# Altium PCB connect.PcbDoc
Units mil, origin at the board's own origin, x right, y up, seen from the top; angles counter-clockwise.
Board outline 2070 x 1710 mil, 2 copper layers (Top Layer, Bottom Layer); 9 components, 19 nets, 101 pads, 1 vias.
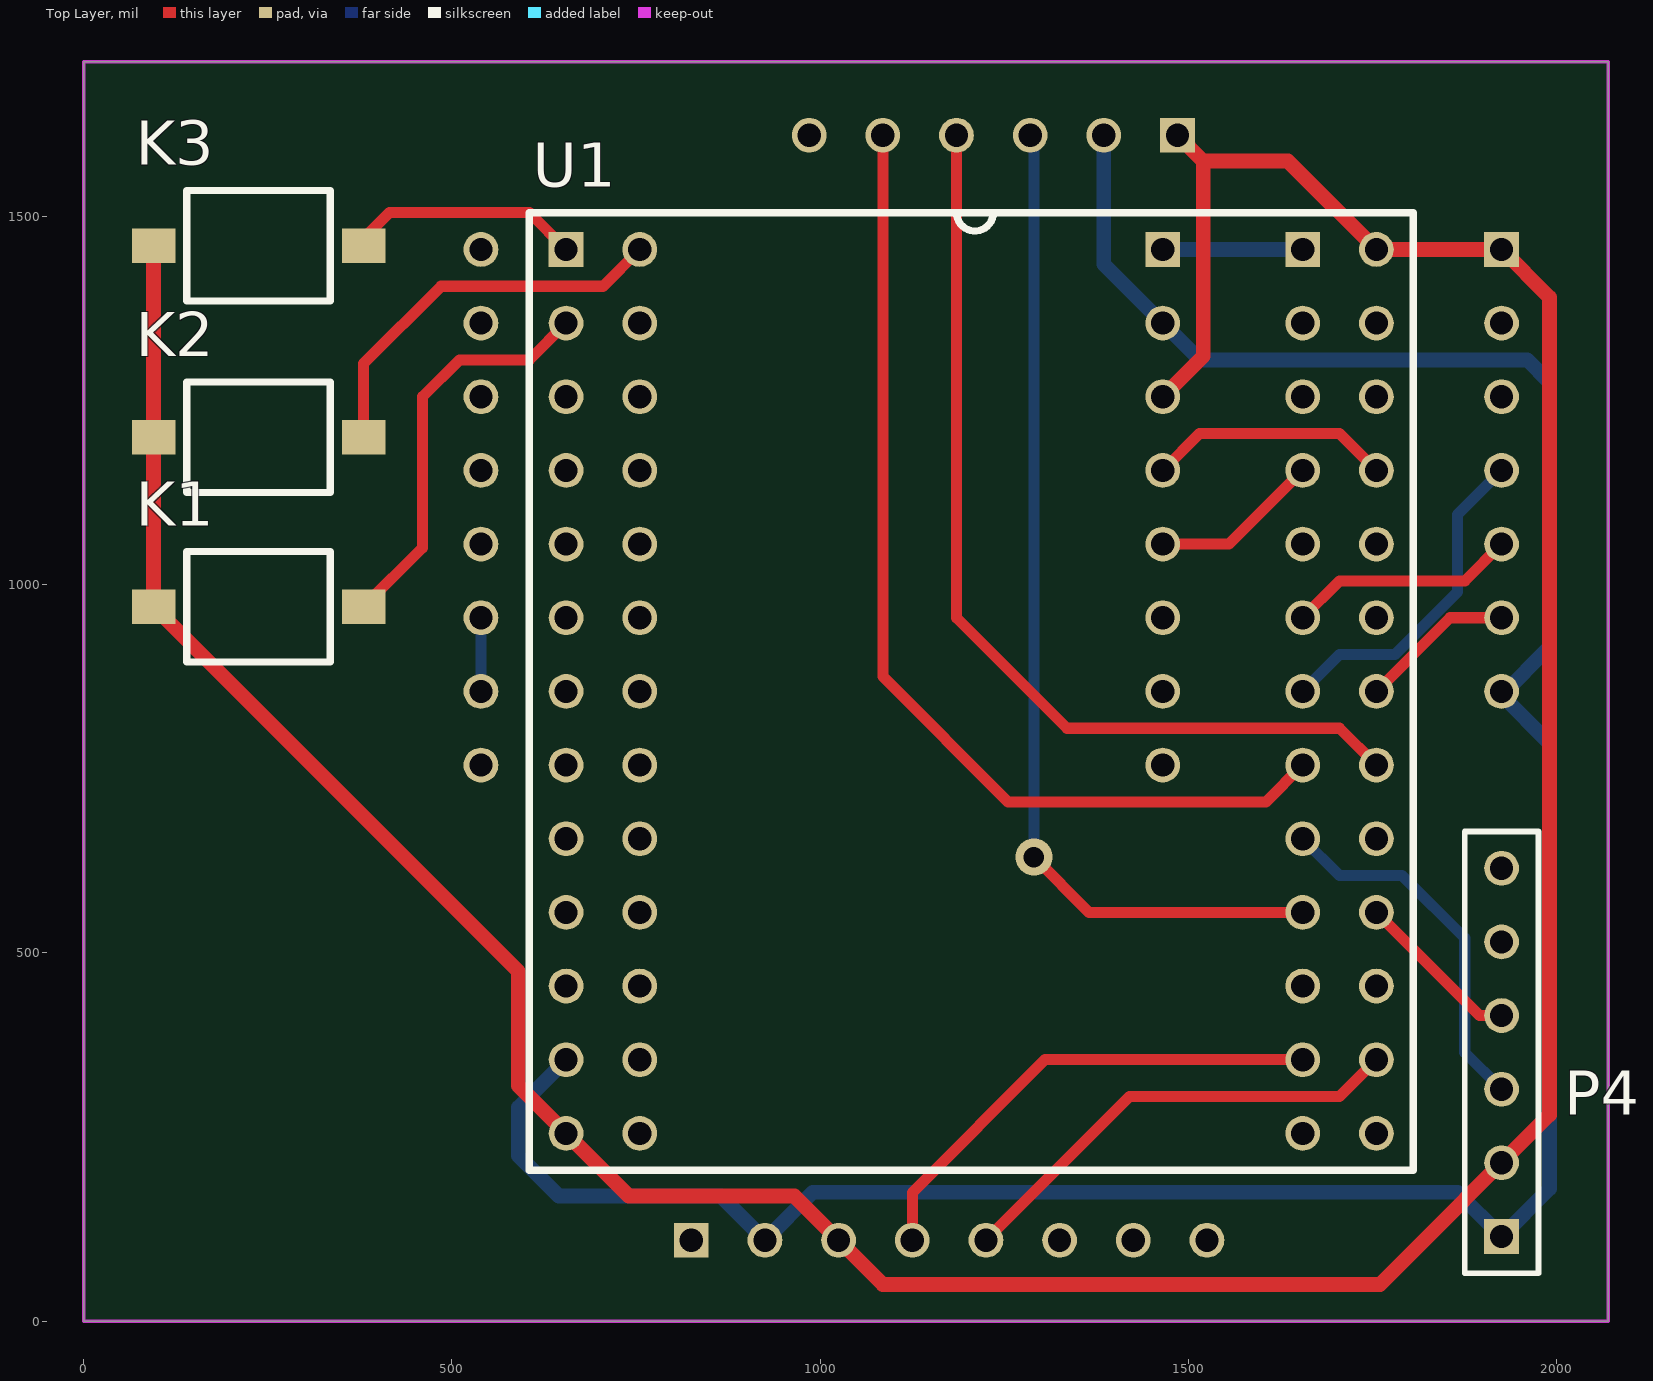
[diagram p0: Top Layer view]
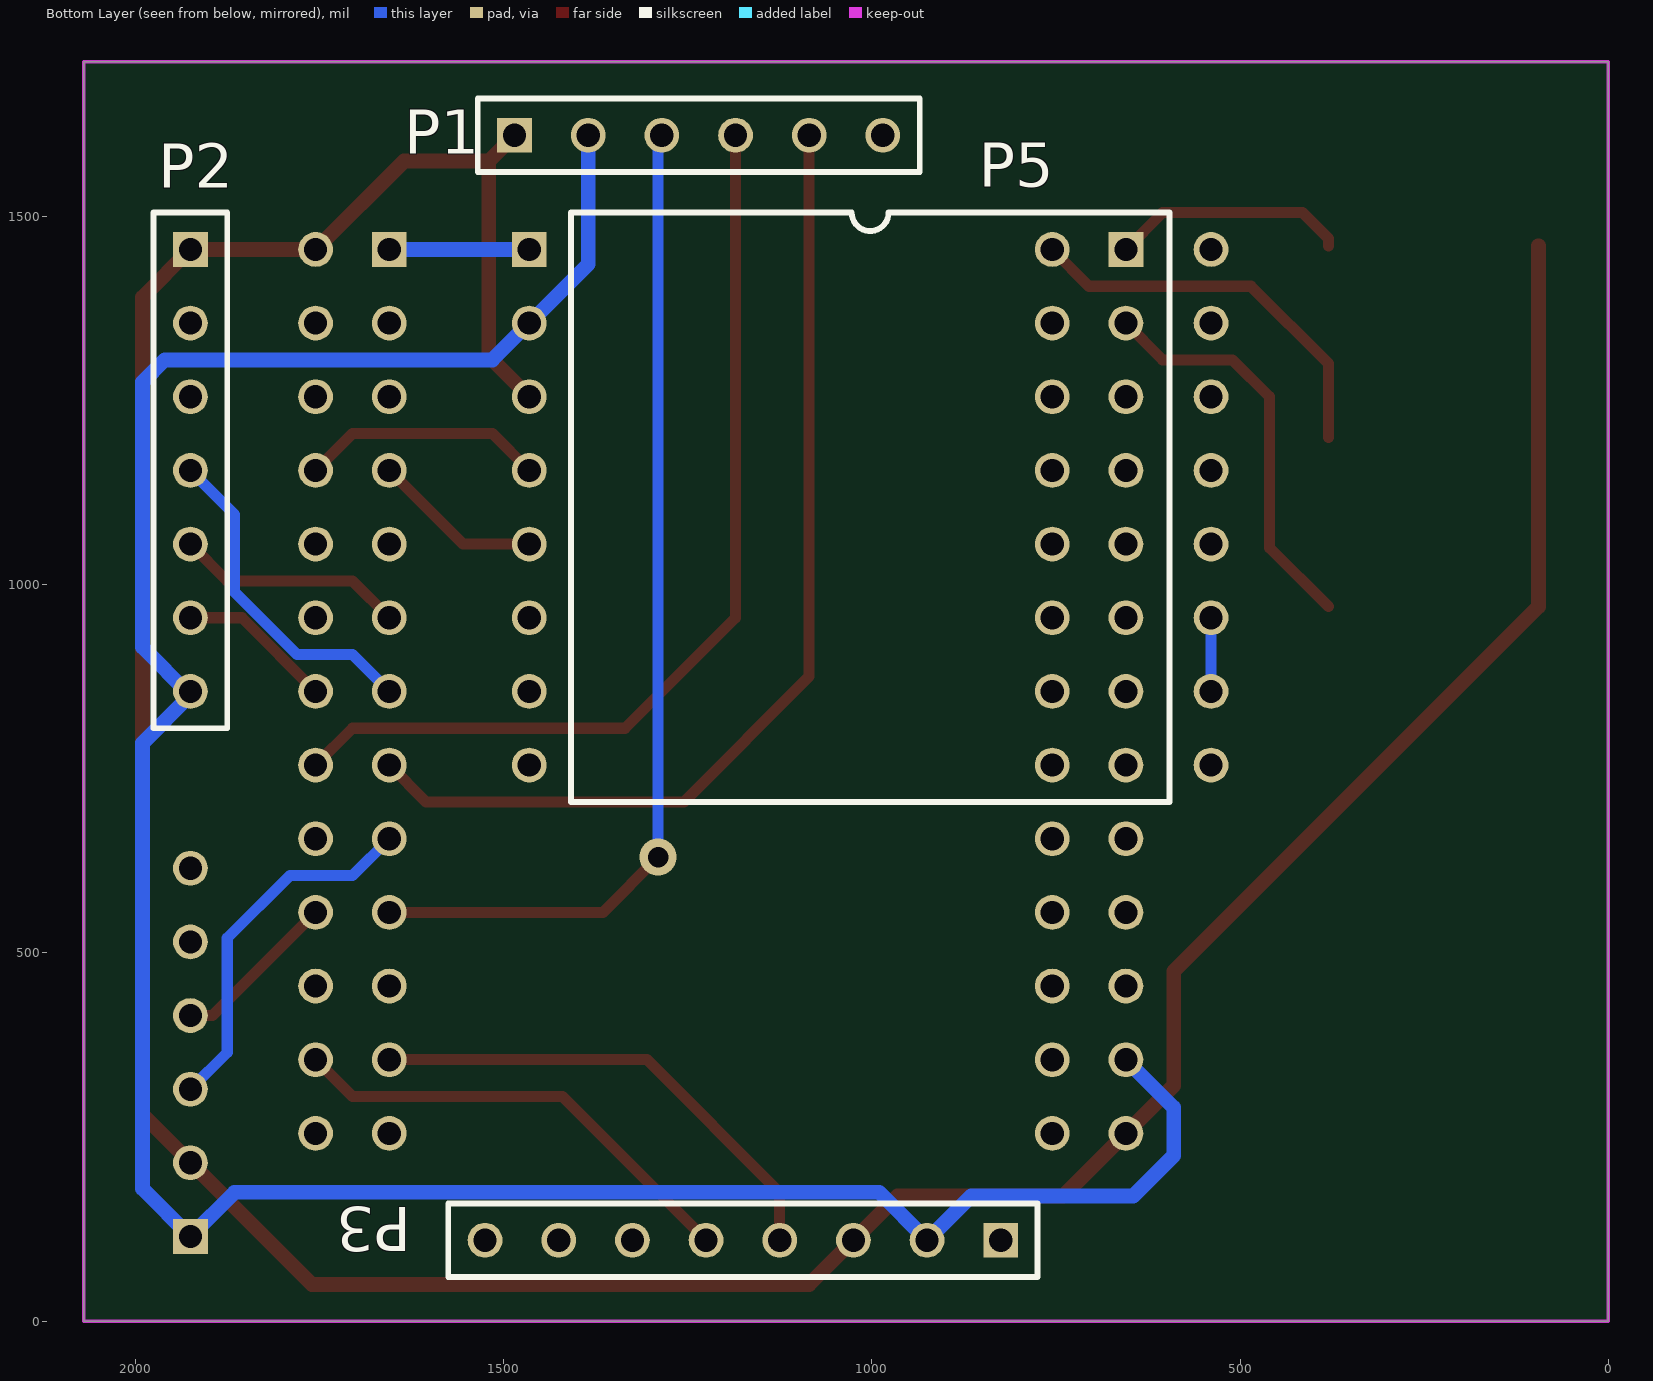
[diagram p1: Bottom Layer view, seen from below]

## Layer stack, top to bottom
Top Layer: signal copper 1.4
Dielectric: dielectric 12.6, FR-4, Dk 4.8
Bottom Layer: signal copper 1.4

## Board outline
0,0 0,1710 2070,1710 2070,0

## Design rules (kind name [scope] priority, off if disabled: settings)
Clearance [All] p1: gap=15
ComponentClearance [All] p1: gap=10 collisioncheckmode=3 verticalgap=10
PolygonConnect [All] p1: connectstyle=Relief reliefconductorwidth=10 reliefentries=4 polygonreliefangle="90 Angle"
RoutingVias [All] p1: holewidth=28 width=50 viastyle="Through Hole" minholewidth=28 minwidth=50 maxholewidth=28 maxwidth=50
SolderMaskExpansion [All] p1: expansion=4
TestPointUsage [All] p1: valid=0 allowmultiple=FALSE
Testpoint [All] p1: side=15 testpointundercomponent=TRUE minsize=40 maxsize=100 preferedsize=60 minholesize=0 maxholesize=40 preferedholesize=32 testpointgrid=1 style=1023 order=0123456789
Width Width_5.0 [InNet('5.0V')] p1: maxlimit=20 minlimit=10 preferedwidth=20
Width Width_3.3 [All] p2: maxlimit=20 minlimit=10 preferedwidth=20
Width Width_1 [All] p3: maxlimit=15 minlimit=10 preferedwidth=15
Width Width_GND [InNet('GND')] p4: maxlimit=20 minlimit=10 preferedwidth=20
18 further rules are at their usual default settings.

## Components (designator, comment, footprint, x,y, rotation, side; value= is the part's Value field where it differs from the comment)
K1 "KEY" KEY 95,970 r0 top
K2 "KEY" KEY 95,1200 r0 top
K3 "KEY" KEY 95,1460 r0 top
P1 "AD8232" AD8232 1485,1610 r180 bottom
P2 "MAX30102" MAX30102 1925,1455 r270 bottom
P3 "MPU" MPU 825,110 r0 bottom
P4 "WIFI" WIFI 1925,115 r90 top
P5 "GPRS" GPRS 1465,1455 r180 bottom
U1 "CORE_BOARD" CORE_BOARD 655,1455 r0 top

## Footprints (in the part's own frame and the unit in brackets; to place one, negate y for a bottom-side part, rotate by r counter-clockwise, add the part's x,y. Pads: shape width x height; smd on the part's side, far side on the other; paste and mask are expansions set on the pad)
AD8232 [mm] "Connector; Header; 6 Position"
  rect 1.2x1.2 hole 0.8: 1(0,0)
  round 1.2 hole 0.8: 2(2.54,0) 3(5.08,0) 4(7.62,0) 5(10.16,0) 6(12.7,0)
  silkscreen extent -1.27,-1.27 13.97,1.27
CORE_BOARD [mm]
  rect 1.2x1.2 hole 0.8: 1(0,0) 27(25.4,0)
  round 1.2 hole 0.8: 2(0,-2.54) 3(0,-5.08) 4(0,-7.62) 5(0,-10.16) 6(0,-12.7) 7(0,-15.24) 8(0,-17.78) 9(0,-20.32) 10(0,-22.86) 11(0,-25.4) 12(0,-27.94) 13(0,-30.48) 14(2.54,-30.48) 15(2.54,-27.94) 16(2.54,-25.4) 17(2.54,-22.86) 18(2.54,-20.32) 19(2.54,-17.78) 20(2.54,-15.24) 21(2.54,-12.7) 22(2.54,-10.16) 23(2.54,-7.62) 24(2.54,-5.08) 25(2.54,-2.54) 26(2.54,0) 28(25.4,-2.54) 29(25.4,-5.08) 30(25.4,-7.62) 31(25.4,-10.16) 32(25.4,-12.7) 33(25.4,-15.24) 34(25.4,-17.78) 35(25.4,-20.32) 36(25.4,-22.86) 37(25.4,-25.4) 38(25.4,-27.94) 39(25.4,-30.48) 40(27.94,-30.48) 41(27.94,-27.94) 42(27.94,-25.4) 43(27.94,-22.86) 44(27.94,-20.32) 45(27.94,-17.78) 46(27.94,-15.24) 47(27.94,-12.7) 48(27.94,-10.16) 49(27.94,-7.62) 50(27.94,-5.08) 51(27.94,-2.54) 52(27.94,0)
  silkscreen extent -1.27,-31.75 29.21,1.27
GPRS [mm]
  rect 1.2x1.2 hole 0.8: 1(0,0)
  round 1.2 hole 0.8: 2(0,-2.54) 3(0,-5.08) 4(0,-7.62) 5(0,-10.16) 6(0,-12.7) 7(0,-15.24) 8(0,-17.78) 9(23.51,-17.78) 10(23.51,-15.24) 11(23.51,-12.7) 12(23.51,-10.16) 13(23.51,-7.62) 14(23.51,-5.08) 15(23.51,-2.54) 16(23.51,0)
  silkscreen extent 1.43,-19.05 22.08,1.27
KEY [mm]
  rect 1.5x1.2 smd: 1(0,0) 2(7.239,0)
  silkscreen extent 1.14,-1.91 6.1,1.91
MAX30102 [mm] "Connector; Header; 7 Position"
  rect 1.2x1.2 hole 0.8: 1(0,0)
  round 1.2 hole 0.8: 2(2.54,0) 3(5.08,0) 4(7.62,0) 5(10.16,0) 6(12.7,0) 7(15.24,0)
  silkscreen extent -1.27,-1.27 16.51,1.27
MPU [mm] "Connector; Header; 8 Position"
  rect 1.2x1.2 hole 0.8: 1(0,0)
  round 1.2 hole 0.8: 2(2.54,0) 3(5.08,0) 4(7.62,0) 5(10.16,0) 6(12.7,0) 7(15.24,0) 8(17.78,0)
  silkscreen extent -1.27,-1.27 19.05,1.27
WIFI [mm] "Connector; Header; 6 Position"
  rect 1.2x1.2 hole 0.8: 1(0,0)
  round 1.2 hole 0.8: 2(2.54,0) 3(5.08,0) 4(7.62,0) 5(10.16,0) 6(12.7,0)
  silkscreen extent -1.27,-1.27 13.97,1.27

## Via types
v1: diameter 50, hole 28, Top Layer to Bottom Layer, 1 vias

## Nets (pads, with @x,y where several pads share a name; then routed paths per layer and width w, separated by ;. In a path a pad name is that pad's centre, name@x,y a point inside that pad or via, vN(x,y) a via of type N, cw(c..) or ccw(c..) an arc to the next point about the centre after c; other vN are vias at no path point)
3.3V: P1.2 P2.7 P3.2 P4.1 P5.2 U1.12 | length 3678.4
  Bottom Layer w20: U1.12 590,290 590,225 645,170 865,170 P3.2 990,175 1865,175 P4.1 1990,180 1990,785 1925,850 1990,915 1990,1275 1960,1305 1515,1305 1385,1435 P1.2
5.0V: P5.1 U1.27 | length 190
  Bottom Layer w20: P5.1 U1.27
GND: K1.1 K2.1 K3.1 P1.1 P2.1 P3.3 P4.2 P5.3 U1.13 U1.52 | length 5001.1
  Top Layer w20: K3.1 K1.1 590,475 590,320 740,170 965,170 1085,50 1760,50 1990,280 1990,1390 P2.1 U1.52 1635,1575 1520,1575 ; P5.3 1520,1310 1520,1575 ; P1.1 1520,1575
NetP5_10: P5.10 P5.11 | length 100
  Bottom Layer w15: P5.10 P5.11
PA1: P1.3 U1.36 | length 1371.1
  Top Layer w15: v1(1290,630) 1365,555 U1.36
  Bottom Layer w15: v1(1290,630) P1.3@1290,1605
PA2: P4.4 U1.43 | length 228
  Top Layer w15: U1.43 1895,415 P4.4
PA3: P4.3 U1.35 | length 501.6
  Bottom Layer w15: U1.35 1705,605 1790,605 1875,520 1875,365 P4.3
PA5: P1.5 U1.34 | length 1396.1
  Top Layer w15: P1.5 1085,875 1255,705 1605,705 U1.34
PA6: P1.4 U1.45 | length 1307.8
  Top Layer w15: P1.4 1185,955 1335,805 1705,805 U1.45
PA7: P2.4 U1.33 | length 455.8
  Bottom Layer w15: U1.33 1705,905 1780,905 1865,990 1865,1095 P2.4
PB10: P5.5 U1.30 | length 231.4
  Top Layer w15: P5.5 1555,1055 U1.30
PB11: P5.4 U1.49 | length 331.4
  Top Layer w15: P5.4 1515,1205 1705,1205 U1.49
PC1: P3.4 U1.38 | length 669.6
  Top Layer w15: P3.4 1125,175 1305,355 U1.38
PC2: P3.5 U1.41 | length 631.5
  Top Layer w15: P3.5 1420,305 1705,305 U1.41
PC4: P2.6 U1.46 | length 211.4
  Top Layer w15: U1.46 1855,955 P2.6
PC5: P2.5 U1.32 | length 311.4
  Top Layer w15: U1.32 1705,1005 1875,1005 P2.5
PC6: K2.2 U1.26 | length 539.2
  Top Layer w15: K2.2 380,1300 485,1405 705,1405 U1.26
PC7: K3.2 U1.1 | length 320.2
  Top Layer w15: K3.2 380,1470 415,1505 605,1505 U1.1
PC9: K1.2 U1.2 | length 554.6
  Top Layer w15: K1.2 460,1050 460,1255 510,1305 605,1305 U1.2
pads on no net: P1.6 P2.2 P2.3 P3.1 P3.6 P3.7 P3.8 P4.5 P4.6 P5.6 P5.7 P5.8 P5.9 P5.12 P5.13 P5.14 P5.15 P5.16 U1.3 U1.4 U1.5 U1.6 U1.7 U1.8 U1.9 U1.10 U1.11 U1.14 U1.15 U1.16 U1.17 U1.18 U1.19 U1.20 U1.21 U1.22 U1.23 U1.24 U1.25 U1.28 U1.29 U1.31 U1.37 U1.39 U1.40 U1.42 U1.44 U1.47 U1.48 U1.50 U1.51

## Keep-outs
Keep-Out Layer:
  lines w5: 0,0 245,0 2070,0 2070,1710 0,1710 0,0